# Altium PCB PCB.PcbDoc
Units mm, origin at the board's own origin, x right, y up, seen from the top; angles counter-clockwise.
Board outline 46.61 x 33.91 mm, 2 copper layers (Top Layer, Bottom Layer); 65 components, 51 nets, 209 pads, 88 vias.
Unrouted connection lines stored in the file: 2.
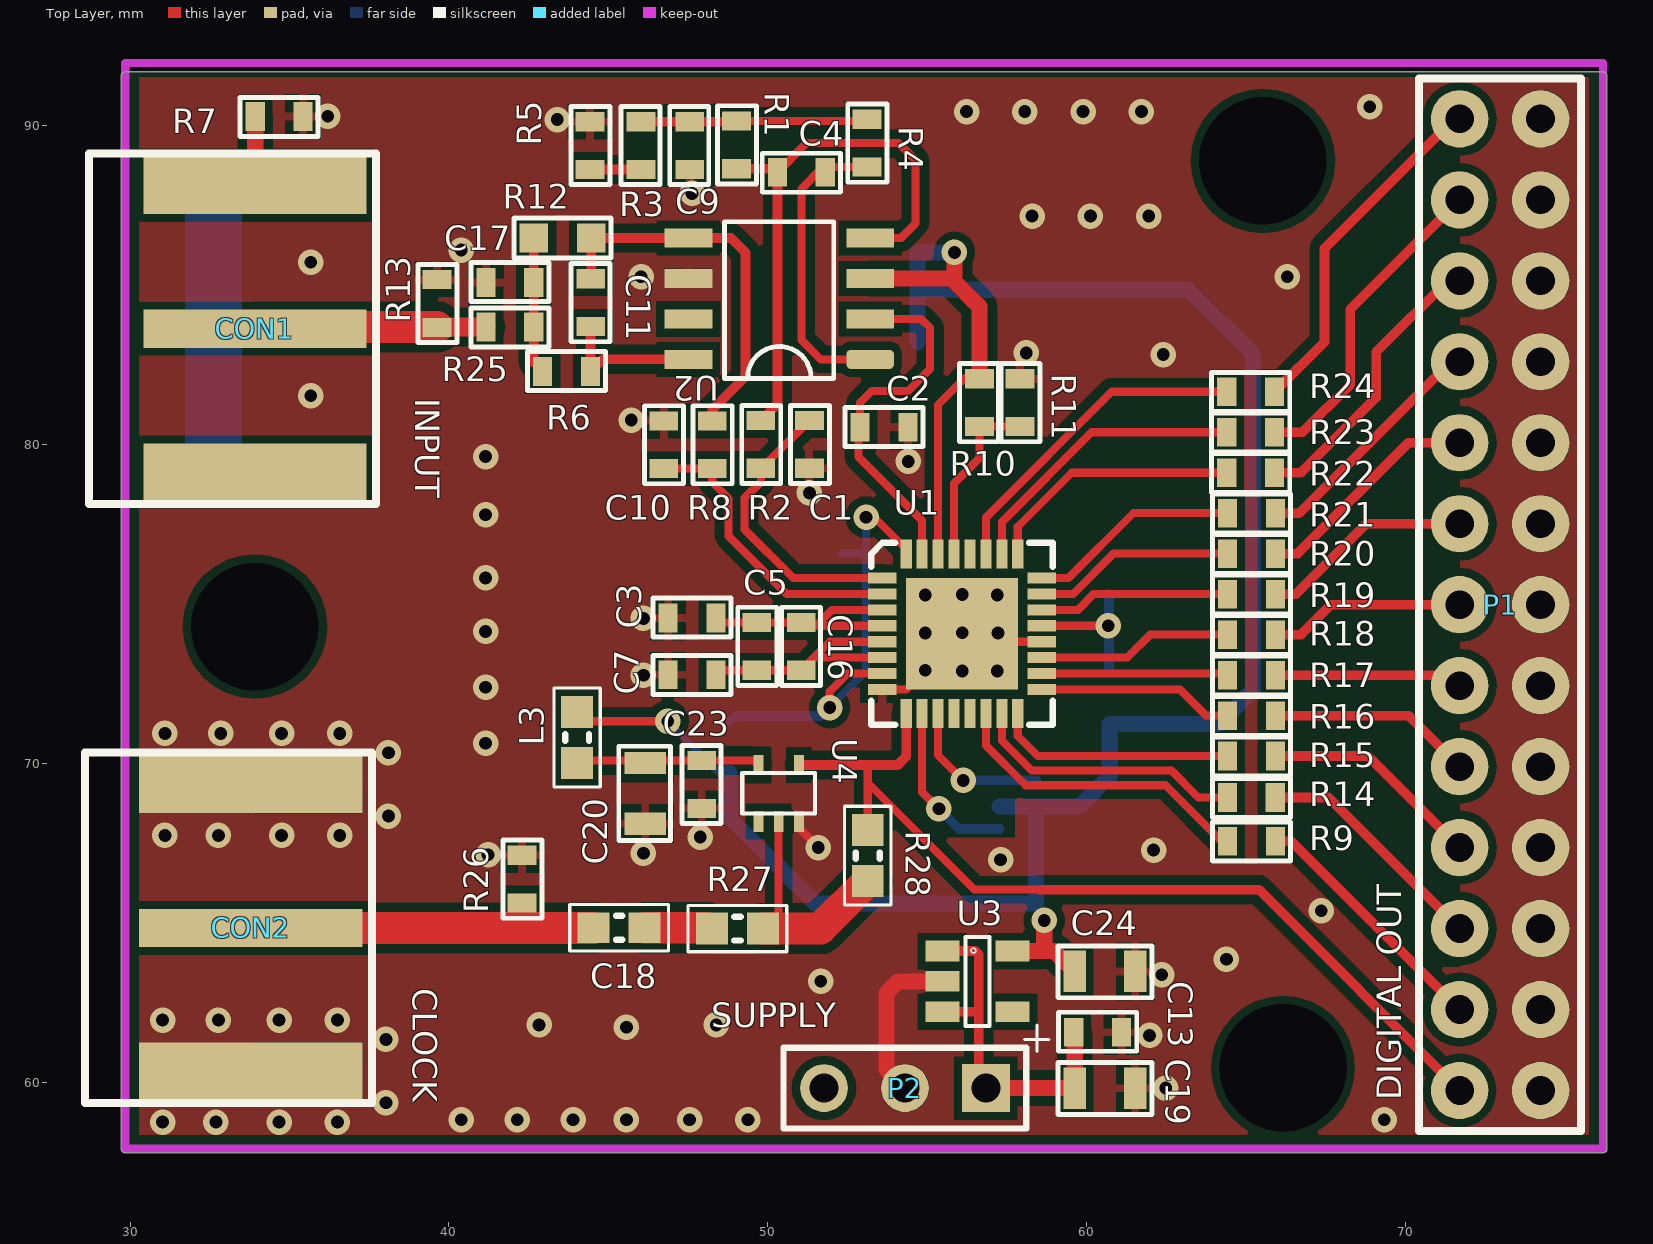
[diagram p0: Top Layer view]
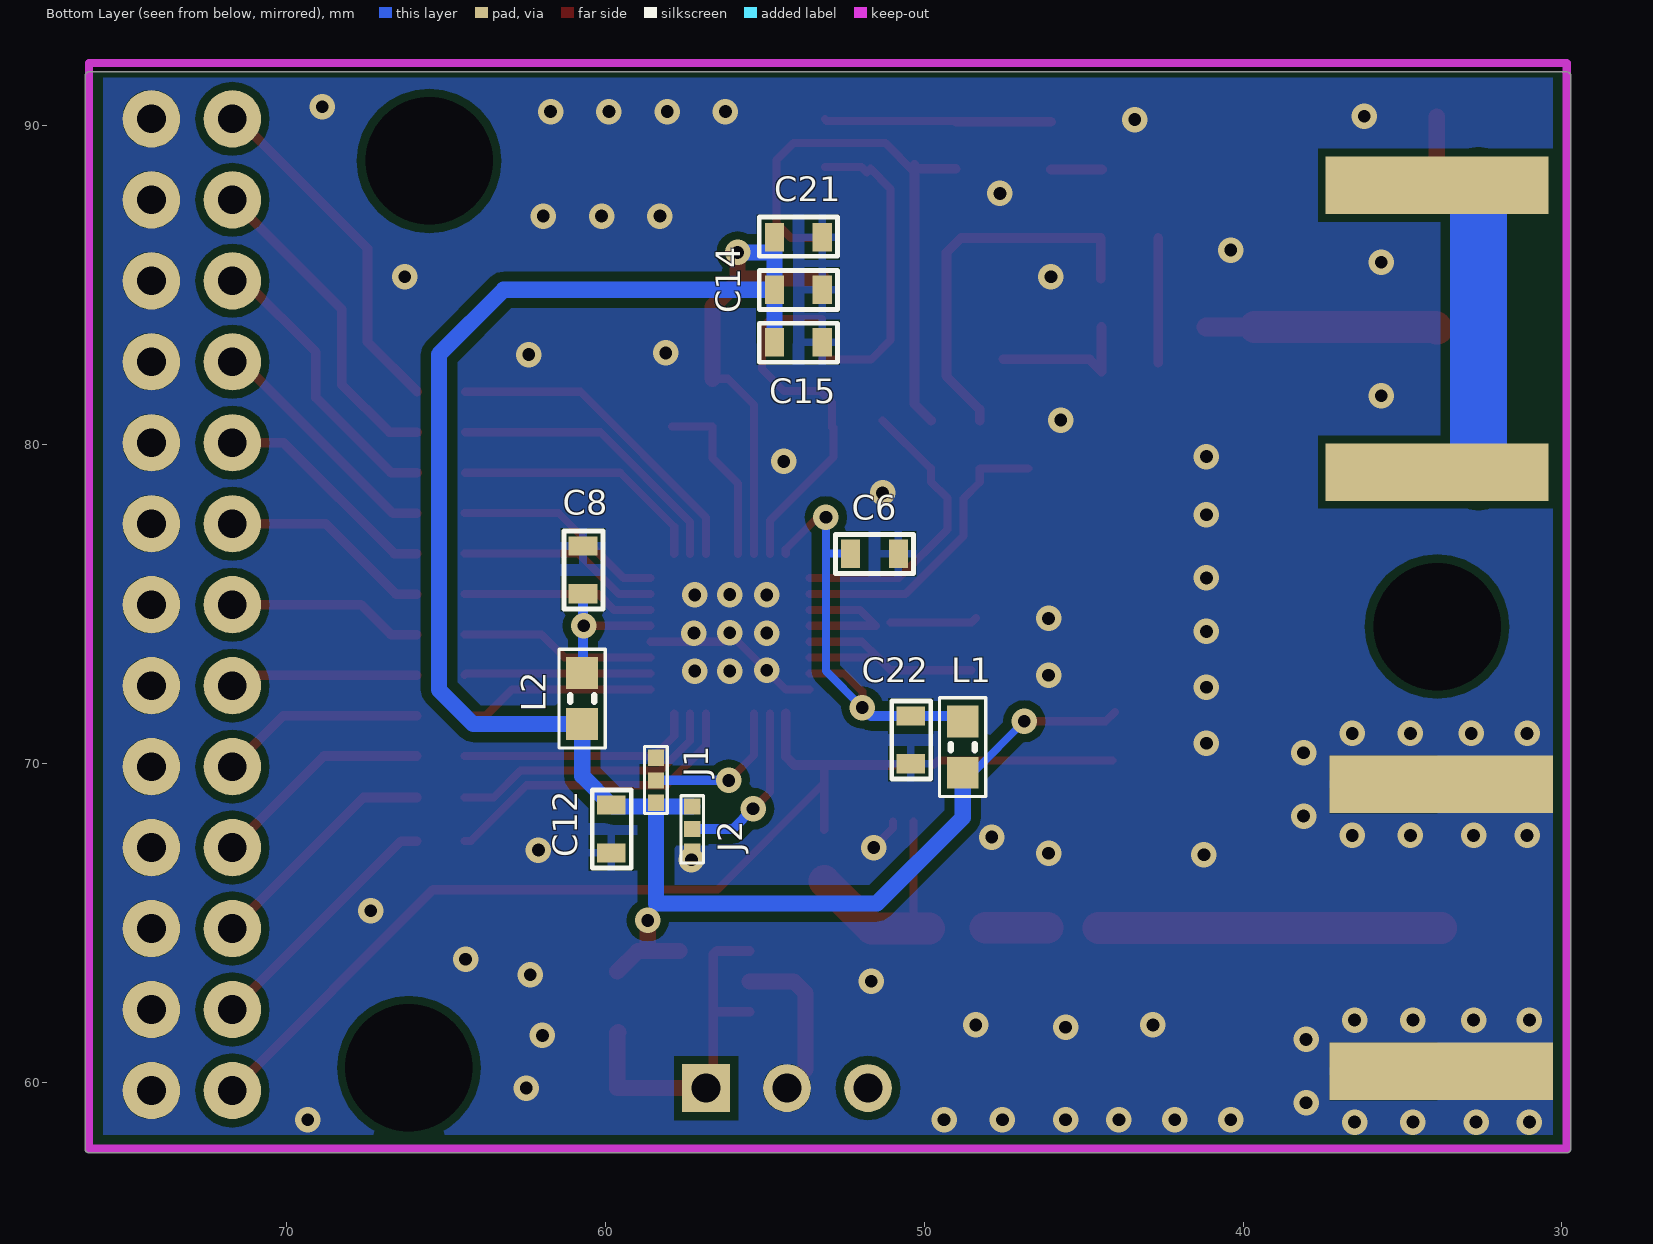
[diagram p1: Bottom Layer view, seen from below]
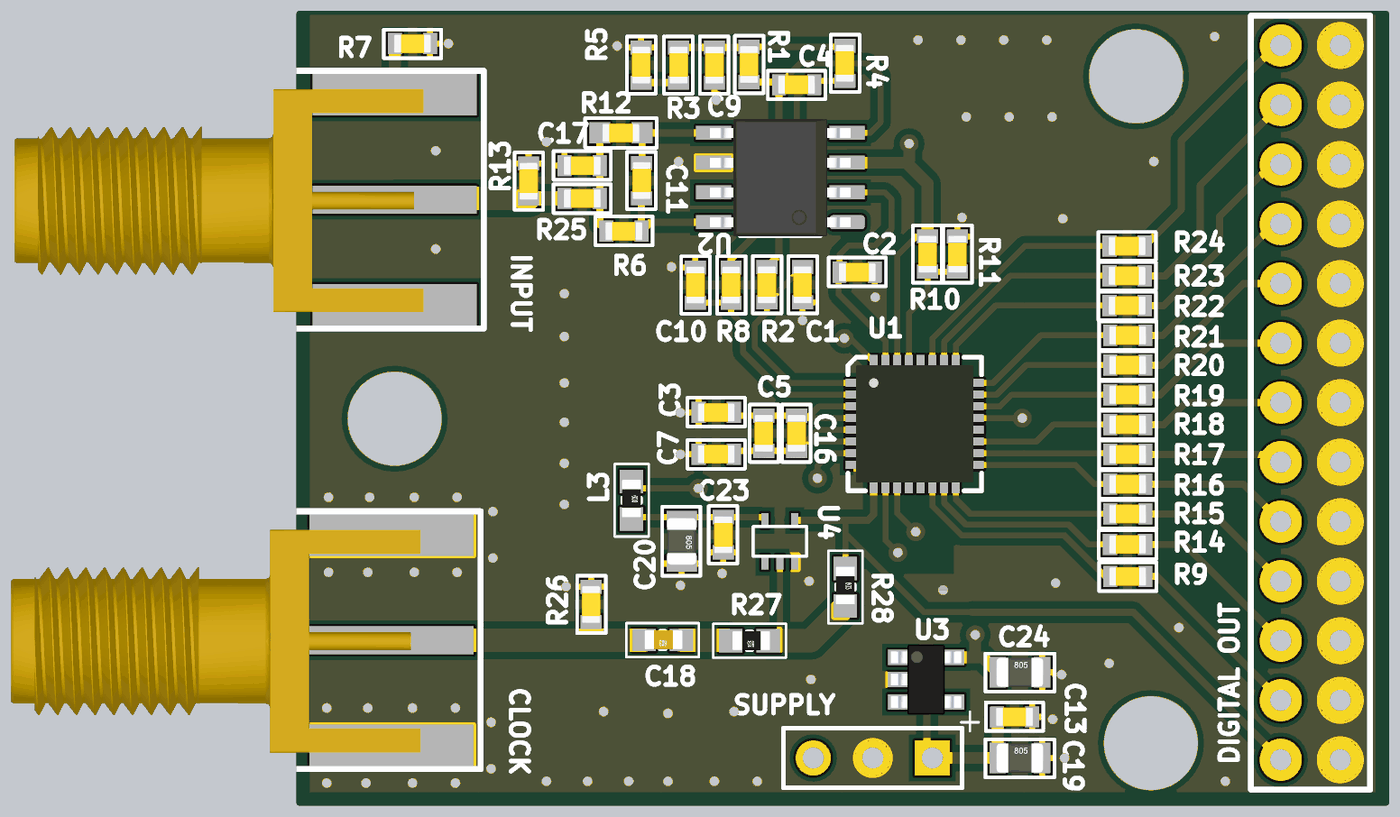
[diagram p2: 3D render of the assembled board from above, using the file's embedded part models]
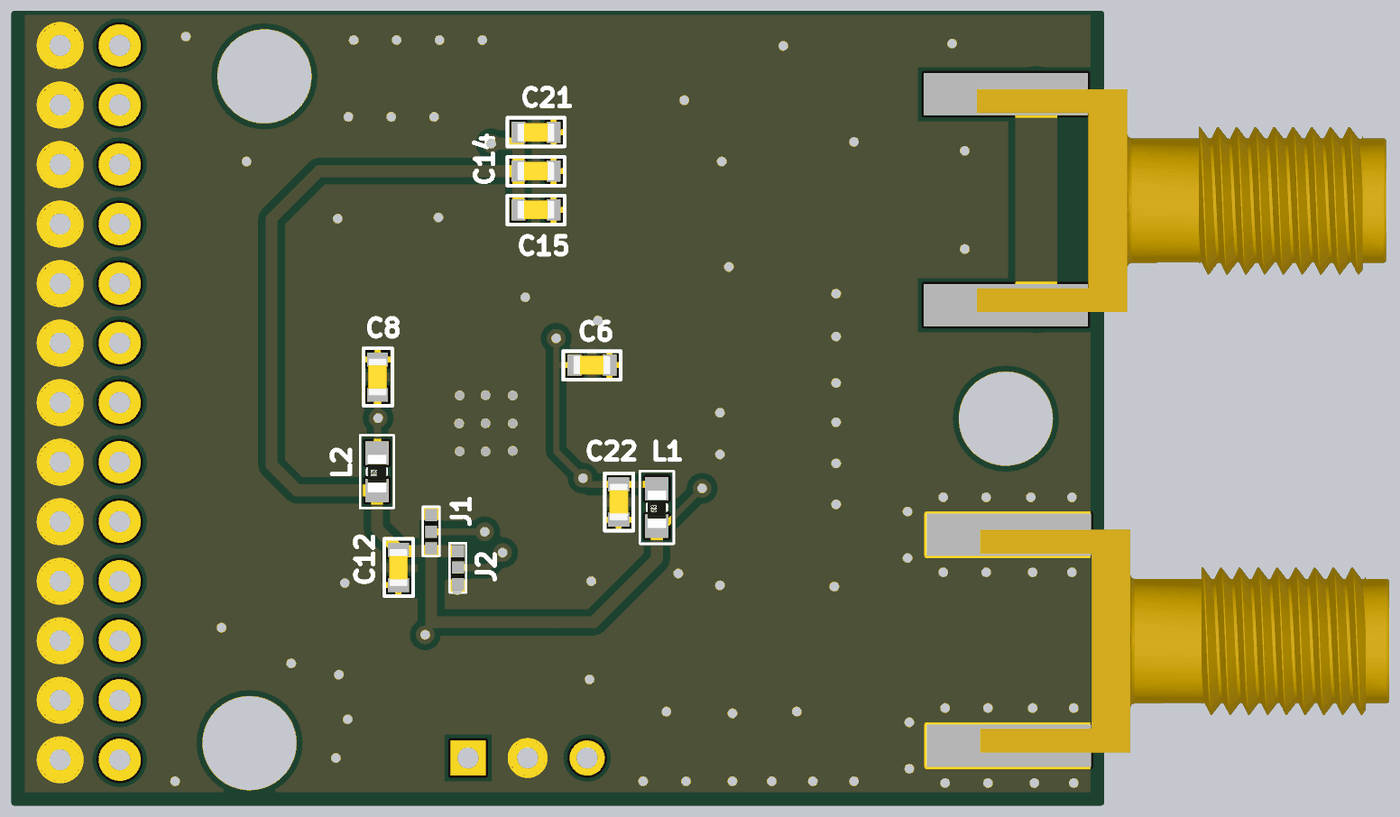
[diagram p3: 3D render of the assembled board from below, using the file's embedded part models]

## Layer stack, top to bottom
Top Solder: solder mask 0.0102, Solder Resist, Dk 3.5
Top Layer: signal copper 0.0356
Dielectric 1: dielectric 0.32, FR-4, Dk 4.8
Bottom Layer: signal copper 0.0356
Bottom Solder: solder mask 0.0102, Solder Resist, Dk 3.5

## Board outline
29.845,57.785 cw(c29.845,57.912) 29.718,57.912 29.718,91.567 cw(c29.845,91.567) 29.845,91.694 76.2,91.694 cw(c76.2,91.567) 76.327,91.567 76.327,57.912 cw(c76.2,57.912) 76.2,57.785

## Design rules (kind name [scope] priority, off if disabled: settings)
Clearance [All] p1: gap=0.305 except(0.127: SMDPad-SMDPad; 0.152: Track-SMDPad; 0.203: Track-Track THPad-THPad; 0.254: SMDPad-Poly THPad-Poly Via-Poly Fill-Poly Poly-Poly Poly-Region Poly-Text)
DiffPairsRouting [All] p1: maxlimit=0.254 minlimit=0.254 mostfreqgap=0.254 toplayer_minwidth=0.254 toplayer_maxwidth=0.254 toplayer_prefwidth=0.254 bottomlayer_minwidth=0.254 bottomlayer_maxwidth=0.254 bottomlayer_prefwidth=0.254 maxuncoupledlength=12.7
Length InNet('OUT_P') [InNet('OUT_N')] p1: maxlimit=11.223 minlimit=0
PlaneConnect [All] p1: planeconnectstyle=Direct reliefexpansion=0.508 reliefentries=4 reliefconductorwidth=0.254 reliefairgap=0.254
PolygonConnect [(HasFootprint('0603') OR HasFootprint('0603CW') OR HasFootprint('0805') OR HasFootprint('R0603') OR HasFootprint('QFN32'))] p1: connectstyle=Relief reliefconductorwidth=0.254 reliefentries=4 polygonreliefangle="90 Angle" airgapwidth=0.254
PolygonConnect PolygonConnect_vias [(InNet('GND') AND isVia )] p2: connectstyle=Direct reliefconductorwidth=0.254 reliefentries=4 polygonreliefangle="90 Angle" airgapwidth=0.254
RoomDefinition schemat [InComponentClass('schemat')] p1: confinementstyle=ConfineIn formatcopy=TRUE lockcomponents=FALSE outline 0,9.779 517.271,9.779 517.271,148.717 0,148.717
RoutingVias [All] p1: holewidth=0.4 width=0.8 viastyle="Through Hole" minholewidth=0.4 minwidth=0.8 maxholewidth=0.4 maxwidth=0.8
SolderMaskExpansion [All] p1: expansion=0.102
Width [All] p1: maxlimit=2 minlimit=0.254 preferedwidth=0.305
28 further rules are at their usual default settings.

## Classes and differential pairs
differential pair OUT: +OUT_P -OUT_N

## Components (designator, comment, footprint, x,y, rotation, side; value= is the part's Value field where it differs from the comment)
C1 "6.8p" 0603 51.308,80.01 r270 top
C2 "2.2uF" 0603 53.645,80.543 r0 top
C3 "1uF" 0603 47.625,74.562 r0 top
C4 "0.47pF" 0603 51.054,88.544 r180 top
C5 "2.2uF" 0603 49.657,73.673 r270 top
C6 "100nF" 0603 51.562,76.581 r0 bottom
C7 "1uF" 0603 47.625,72.784 r180 top
C8 "100nF" 0603 60.706,76.073 r270 bottom
C9 "4.7pF" 0603 47.549,89.383 r90 top
C10 "6.8p" 0603 46.736,79.998 r270 top
C11 "0.47pF" 0603 44.45,84.455 r90 top
C12 "1u" 0603 59.817,67.945 r270 bottom
C13 "100n" 0603 60.35,61.57 r0 top
C14 "100nF" 0603 53.95,84.861 r0 bottom
C15 "10n" 0603 53.95,83.21 r0 bottom
C16 "100nF" 0603 51.054,73.673 r90 top
C17 "4.7pF" 0603 41.91,85.09 r0 top
C18 "100nF" C0603 45.339,64.846 r180 top
C19 "6.8u" 0805 60.579,59.817 r0 top
C20 "10uF X7R" 0805 46.152,69.063 r270 top
C21 "4.7uF" 0603 53.95,86.512 r180 bottom
C22 "100nF" 0603 50.419,70.739 r270 bottom
C23 "100nF" 0603 47.93,69.342 r90 top
C24 "10uF X7R" 0805 60.579,63.475 r0 top
CON1 "INPUT" SMA-16 33.909,88.138 r270 top
CON2 "CLOCK" SMA-16 33.782,69.342 r270 top
J1 "ZW2/1" ZW2/1 58.42,69.469 r90 bottom
J2 "ZW2/1" ZW2/1 57.277,67.945 r270 bottom
L1 "Bead" R0603 48.768,70.485 r90 bottom
L2 "Bead" R0603 60.706,72.009 r90 bottom
L3 "Bead" R0603 43.993,70.841 r270 top
P1 "DIGITAL OUT" Header2x13 71.704,90.221 r0 top
P2 "SUPPLY" HDR1X3 56.845,59.817 r180 top
R1 "6.2k" 0603 49.022,89.408 r270 top
R2 "560" 0603 49.784,80.01 r270 top
R3 "3k" 0603 46.025,89.383 r90 top
R4 "8.2k" 0603 53.111,89.459 r270 top
R5 "24.9" 0603 44.425,89.383 r270 top
R6 "8.2k" 0603 43.688,82.296 r0 top
R7 "2R" 0603 34.671,90.297 r180 top
R8 "560" 0603 48.26,79.998 r270 top
R9 "47R" 0603 65.176,67.564 r180 top
R10 "TBD" 0603 56.642,81.317 r90 top
R11 "TBD" 0603 57.912,81.317 r270 top
R12 "6.2k" 0603CW 43.561,86.487 r180 top
R13 "49.9R" 0603 39.624,84.43 r270 top
R14 "47R" 0603 65.172,68.93 r180 top
R15 "47R" 0603 65.176,70.231 r180 top
R16 "47R" 0603 65.176,71.501 r180 top
R17 "47R" 0603 65.176,72.771 r180 top
R18 "47R" 0603 65.176,74.041 r180 top
R19 "47R" 0603 65.176,75.311 r180 top
R20 "47R" 0603 65.176,76.581 r180 top
R21 "47R" 0603 65.176,77.851 r180 top
R22 "47R" 0603 65.151,79.121 r180 top
R23 "47R" 0603 65.151,80.391 r180 top
R24 "47R" 0603 65.151,81.661 r180 top
R25 "3k" 0603 41.91,83.693 r180 top
R26 "49.9R" 0603 42.291,66.37 r270 top
R27 "XX" R0603 49.073,64.846 r180 top
R28 "XX" R0603 53.111,67.132 r270 top
U1 "LTC2227" QFN32 53.594,75.819 r0 top
U2 "AD8132" SOIC8 53.213,82.677 r180 top
U3 "TLV70033DDCT" SOT23-5 56.54,63.094 r270 top
U4 "74AHC1G04" "TSSOP5 (SOT353-1)" 50.343,69.063 r0 top

## Footprints (in the part's own frame and the unit in brackets; to place one, negate y for a bottom-side part, rotate by r counter-clockwise, add the part's x,y. Pads: shape width x height; smd on the part's side, far side on the other; paste and mask are expansions set on the pad)
0603 [mm]
  rect 0.6x0.9 smd: 1(-0.75,0) 2(0.75,0)
  silkscreen extent -1.22,-0.6 1.22,0.63, body extent -0.8,-0.4 0.8,0.4, height 0.86
0603CW [mm]
  rect 0.9x0.9 smd: 1(-0.9,0) 2(0.9,0)
  silkscreen extent -1.53,-0.63 1.53,0.63, body extent -0.8,-0.4 0.8,0.4, height 0.86
0805 [mm]
  rect 0.7x1.3 smd: 1(-0.95,0) 2(0.95,0)
  silkscreen extent -1.48,-0.82 1.48,0.8, body extent -1,-0.62 1,0.62, height 0.78
C0603 [mm]
  rect 1x0.95 smd: 1(-0.8,0) 2(0.8,0)
  silkscreen extent -1.55,-0.72 1.55,0.72, body extent -0.84,-0.42 0.76,0.38, height 0.3
HDR1X3 [mm] "Connector; Header; 3 Position"
  rect 1.5x1.5 hole 0.9: 1(0,0)
  round 1.5 hole 0.9: 2(2.54,0) 3(5.08,0)
  silkscreen extent -1.27,-1.27 6.35,1.27
Header2x13 [mm] "2,54mm"
  round 1.8 hole 0.9: 1(0,0) 2(2.54,0) 3(0,-2.54) 4(2.54,-2.54) 5(0,-5.08) 6(2.54,-5.08) 7(0,-7.62) 8(2.54,-7.62) 9(0,-10.16) 10(2.54,-10.16) 11(0,-12.7) 12(2.54,-12.7) 13(0,-15.24) 14(2.54,-15.24) 15(0,-17.78) 16(2.54,-17.78) 17(0,-20.32) 18(2.54,-20.32) 19(0,-22.86) 20(2.54,-22.86) 21(0,-25.4) 22(2.54,-25.4) 23(0,-27.94) 24(2.54,-27.94) 25(0,-30.48) 26(2.54,-30.48)
  silkscreen extent -1.27,-31.75 3.81,1.27
QFN32 [mm]
  rect 0.9x0.35 smd: 1(0,0) 2(0,-0.5) 3(0,-1) 4(0,-1.5) 5(0,-2) 6(0,-2.5) 7(0,-3) 8(0,-3.5) 17(5,-3.5) 18(5,-3) 19(5,-2.5) 20(5,-2) 21(5,-1.5) 22(5,-1) 23(5,-0.5) 24(5,0)
  rect 0.35x0.9 smd: 9(0.75,-4.25) 10(1.25,-4.25) 11(1.75,-4.25) 12(2.25,-4.25) 13(2.75,-4.25) 14(3.25,-4.25) 15(3.75,-4.25) 16(4.25,-4.25) 25(4.25,0.75) 26(3.75,0.75) 27(3.25,0.75) 28(2.75,0.75) 29(2.25,0.75) 30(1.75,0.75) 31(1.25,0.75) 32(0.75,0.75)
  rect 3.5x3.5 smd: 33(2.5,-1.75)
  silkscreen extent -0.35,-4.6 5.35,1.1, body extent -0.01,-4.26 5.01,0.76, height 0.75
R0603 [mm]
  rect 1x1 smd: 1(-0.775,0.025) 2(0.825,0.025)
  silkscreen extent -1.52,-0.7 1.58,0.75, body extent -0.85,-0.38 0.75,0.42, height 0.3
SMA-16 [mm] "Gniazdo; SMA; ¿eñskie; z nakrêtk¹ monta¿ow¹, krawêdziowe; SMT"
  rect 1.8x7 smd far side: 1(0,0) 1(9,0)
  rect 1.8x7 smd: 1(0,0) 1(9,0)
  rect 1.2x7 smd: 2(4.5,0)
  silkscreen extent -1,-5.2 10,3.8, body extent -0.22,-16.22 9.3,1.23, height 3.16
SOIC8 [mm]
  rrect50% 1.5x0.6 smd: 1(0,0)
  rect 1.5x0.6 smd: 2(0,-1.27) 3(0,-2.54) 4(0,-3.81) 5(5.7,-3.81) 6(5.7,-2.54) 7(5.7,-1.27) 8(5.7,0)
  silkscreen extent 1.14,-4.32 4.57,0.6, body extent -0.16,-4.41 5.86,0.6, height 1.75
SOT23-5 [mm]
  rect 0.65x1.06 smd: 1(-1.02,-1.06) 2(-0.07,-1.06) 3(0.88,-1.06) 4(0.88,1.14) 5(-1.02,1.14)
  silkscreen extent -1.47,-0.34 1.33,0.42, body extent -1.57,-1.46 1.43,1.54, height 1.3
"TSSOP5 (SOT353-1)" [mil]
  rect 12x25 smd: 1(-25,-35) 2(0,-35) 3(25,-35) 4(25,35) 5(-25,35)
  silkscreen extent -45,-25 45,25
ZW2/1 [mil] "Kropla cyny"
  rect 20x20 smd: 1(-27.56,0) 2(0,0) 3(28,0)
  silkscreen extent -41,-14 42,14

## Part data
C1 C2 C3 C4 C5 C6 C7 C8 C9 C10 C11 C12 C13 C14 C15 C16 C17 C18 C19 C20 C21 C22 C23 C24: library part "Kondensator ceramiczny"
CON1 CON2: library part SMA
L1 L2 L3: library part Inductor, "Inductor"
P1: library part Header2x13
P2: library part "Header 3", "Header, 3-Pin"
R1 R2 R3 R4 R5 R6 R7 R8 R9 R10 R11 R12 R13 R14 R15 R16 R17 R18 R19 R20 R21 R22 R23 R24 R25 R26 R27 R28: library part Rezystor
U1: library part LTC222x
U3: library part LP2980AIM5-3.3, "Micropower 50 mA Ultra Low-Dropout Regulator, 5-pin SOT-23"
U4: "74AHC1G04 and 74AHCT1G04 are high-speed Si-gate CMOS devices. They provide an  inverting buffer."

## Free pads (board coordinates)
  round 1.8 hole 4: 2(66.167,60.452) 3(33.909,74.295) 3(65.532,88.9)

## Via types
v1: diameter 0.8, hole 0.4, Top Layer to Bottom Layer, tented both sides, 79 vias
v2: diameter 0.8, hole 0.4, Top Layer to Bottom Layer, tented bottom, 9 vias

## Nets (pads, with @x,y where several pads share a name; then routed paths per layer and width w, separated by ;. In a path a pad name is that pad's centre, name@x,y a point inside that pad or via, vN(x,y) a via of type N, cw(c..) or ccw(c..) an arc to the next point about the centre after c; other vN are vias at no path point)
3V3: C12.1 C14.2 C15.2 C21.1 C24.1 J1.1 J2.1 L1.1 L2.1 L3.1 R10.2 U1.30 U2.3 U3.5 | length 73.4
  Top Layer w0.254: L3.1 44.31,71.323 v1(46.863,71.323) ; U1.30 55.344,81.252 56.159,82.067 R10.2
  Top Layer w0.508: U2.3 55.753,85.217 ; v1(55.855,86.03) 55.855,85.319 55.753,85.217 ; R10.2 56.642,84.328 55.753,85.217 ; U3.5 58.674,64.114 ; v1(58.674,65.075) 58.674,64.114 ; C24.1 58.99,64.114 58.674,64.114
  Bottom Layer w0.254: v1(46.863,71.323) 48.476,69.71 L1.1
  Bottom Layer w0.508: L1.1 48.793,68.301 51.486,65.608 58.42,65.608 J1.1@58.42,68.645 ; C15.2 C14.2 ; v1(55.855,86.03) 54.7,86.03 C14.2 ; J2.1 J1.1@58.42,68.645 ; C14.2 63.195,84.861 65.227,82.829 65.227,72.314 64.148,71.234 L2.1 60.731,69.609 C12.1 59.767,68.645 J1.1@58.42,68.645
GND: C1.2 C2.2 C3.1 C6.1 C7.2 C8.1 C9.1 C10.1 C12.2 C13.2 C14.1 C15.1 C17.1 C19.2 C20.2 C21.2 C22.2 C23.1 C24.2 CON2.1 J1.3 J2.3 P1.2 P1.4 P1.6 P1.8 P1.10 P1.12 P1.14 P1.16 P1.18 P1.20 P1.22 P1.24 P1.26 P2.2 R5.1 R7.1 R11.1 R13.1 R26.1 U1.8 U1.20 U1.33 U2.6 U3.2 U4.3 | length 11.7
  Top Layer w0.254: U4.3 50.978,67.97 v1(51.587,67.361) ; U1.8 54.344,72.319 U1.33 ; U1.33@56.344,73.819 U1.20
  Top Layer w0.508: P2.2 53.721,60.401 53.721,62.789 54.096,63.164 U3.2
  other v1: 31.013,58.75 32.69,58.75 34.671,58.75 36.5,58.75 40.386,58.826 42.139,58.826 43.891,58.826 45.568,58.826 47.549,58.826 49.378,58.826 69.342,58.826 38.024,59.36 62.484,59.817 38.024,61.341 61.976,61.468 45.568,61.722 42.824,61.798 48.387,61.798 31.013,61.951 32.766,61.951 34.671,61.951 36.5,61.951 51.664,63.17 62.357,63.373 64.389,63.856 67.361,65.38 57.302,66.98 41.224,67.132 46.101,67.183 62.103,67.285 47.879,67.691 31.09,67.742 32.766,67.742 34.747,67.742 36.576,67.742 38.1,68.351 38.1,70.333 41.148,70.637 31.09,70.942 32.842,70.942 34.747,70.942 36.576,70.942 41.148,72.39 46.101,72.771 41.148,74.143 46.101,74.549 41.148,75.819 41.148,77.8 51.308,78.486 54.407,79.477 41.148,79.629 45.72,80.772 35.662,81.534 62.408,82.829 58.108,82.879 46.025,85.268 66.294,85.268 35.662,85.725 40.386,86.106 58.293,87.173 60.122,87.173 61.951,87.173 47.625,87.884 43.4,90.2 36.2,90.3 56.236,90.449 58.064,90.449 59.893,90.449 61.722,90.449 68.885,90.602
  other v2: 56.1,72.9 57.201,72.898 54.94,72.923 54.94,74.092 56.1,74.1 57.226,74.092 54.94,75.286 57.201,75.286 56.1,75.3
NetC2_1: C2.1 U1.31 U2.2 | length 11.5
  Top Layer w0.254: C2.1@52.844,80.543 52.844,79.617 54.844,77.617 U1.31 ; C2.1 52.895,81.317 53.264,81.686 54.407,81.686 55.093,82.372 55.093,83.668 54.813,83.947 U2.2
NetC3_2: C3.2 C5.1 C16.2 U1.3 U1.4 | length 7.1
  Top Layer w0.254: C3.2 48.514,74.423 C5.1 C16.2 ; U1.4 51.511,74.319 52.011,74.819 U1.3
NetC4_1: C4.1 R4.2 U2.1 | length 9.4
  Top Layer w0.254: C4.1@51.69,88.659 51.054,88.023 51.054,83.287 51.664,82.677 U2.1 ; C4.1 51.968,88.709 R4.2
NetC4_2: C4.2 R1.2 R2.1 U2.4 | length 17.9
  Top Layer w0.254: C4.2 51.218,89.459 54.102,89.459 54.635,88.925 54.635,86.944 54.178,86.487 U2.4
  Top Layer w0.305: R1.2 C4.2@50.189,88.658 ; R2.1 50.304,81.28 C4.2 C4.2@50.304,88.773
NetC5_2: C5.2 C7.1 C16.1 U1.5 U1.6 | length 7.6
  Top Layer w0.254: C7.1@48.514,72.923 C5.2 C16.1 51.45,73.319 ; U1.6 51.45,73.319 ; U1.5 51.95,73.819 51.45,73.319
NetC6_2: C6.2 C22.1 L1.2 U1.7 U1.32 | length 14.8
  Top Layer w0.254: v1(51.943,71.755) 51.943,72.263 52.499,72.819 U1.7 ; v1(53.086,77.724) 53.34,77.724 54.344,76.72 U1.32
  Bottom Layer w0.254: v1(51.943,71.755) 53.086,72.898 53.086,76.581 ; C6.2 53.086,76.581 ; v1(53.086,77.724) 53.086,76.581
  Bottom Layer w0.305: L1.2 48.972,71.489 C22.1 51.677,71.489 v1(51.943,71.755)
NetC8_2: C8.2 L2.2 U1.21 | length 4.6
  Top Layer w0.254: U1.21 v1(60.682,74.319)
  Bottom Layer w0.305: L2.2@60.706,72.86 C8.2
NetC9_2: C9.2 R1.1 R3.2 R4.1 | length 7.1
  Top Layer w0.254: R1.1 53.061,90.158 R4.1
  Top Layer w0.305: R3.2 C9.2 R1.1@48.997,90.133
NetC11_1: C11.1 R6.2 U2.8 | length 4.6
  Top Layer w0.305: C11.1@44.438,83.693 R6.2 44.819,82.677 U2.8
NetC11_2: C11.2 R8.1 R12.1 U2.5 | length 12
  Top Layer w0.305: C11.2@44.461,85.216 R12.1 U2.5 48.844,86.487 49.301,86.03 49.301,82.144 48.26,81.102 R8.1
NetC13_1: C13.1 C19.1 P2.1 U3.1 U3.3 | length 10.7
  Top Layer w0.305: U3.3 56.506,62.214 ; U3.1 56.511,64.114 56.617,64.008 P2.1@56.617,60.046
  Top Layer w0.508: P2.1 C19.1 59.629,61.541 C13.1
NetC17_2: C17.2 R6.1 R12.2 R25.1 | length 3.9
  Top Layer w0.305: R6.1@42.661,82.573 R12.2
NetC18_1: C18.1 R27.2 | length 1.9
  Top Layer w1: C18.1 R27.2@48.082,64.846
NetC18_2: C18.2 CON2.2 R26.2 | length 10.8
  Top Layer w1: CON2.2 44.535,64.842 C18.2
NetC20_1: C20.1 C23.2 L3.2 U4.5 | length 5.7
  Top Layer w0.254: L3.2@44.095,70.092 C23.2 49.567,70.092 U4.5
NetCON1_1: CON1.1 R7.2 | length 11.5
  Top Layer w0.508: CON1.1@33.921,88.15 R7.2
  Bottom Layer w0.508: CON1.1@32.233,79.138 CON1.1@32.614,79.138
  Bottom Layer w1.778: CON1.1@32.614,79.138 CON1.1@32.614,88.138
NetCON1_2: CON1.2 R13.2 R25.2 | length 7.3
  Top Layer w0.6: R13.2 39.637,83.693 R25.2
  Top Layer w1: CON1.2 33.964,83.693 R13.2@39.624,83.693
NetJ1_2: J1.2 U1.11 | length 4.7
  Top Layer w0.254: U1.11 55.344,70.259 v1(56.134,69.469)
  Bottom Layer w0.305: v1(56.134,69.469) J1.2
NetJ2_2: J2.2 U1.10 | length 5.4
  Top Layer w0.254: U1.10 54.844,69.108 v1(55.372,68.58)
  Bottom Layer w0.305: v1(55.372,68.58) 56.007,67.945 J2.2
NetP1_1: P1.1 R24.1 | length 11.3
  Top Layer w0.305: R24.1 67.462,83.222 67.462,86.157 71.526,90.221 P1.1 P1.1@71.704,89.992
NetP1_3: P1.3 R23.1 | length 10.2
  Top Layer w0.305: R23.1 66.777,80.391 68.275,81.89 68.275,84.252 P1.3
NetP1_5: P1.5 R22.1 | length 9.1
  Top Layer w0.305: R22.1 66.726,79.121 69.088,81.483 69.088,82.906 71.323,85.141 P1.5
NetP1_7: P1.7 R21.1 | length 7.7
  Top Layer w0.305: R21.1 66.675,77.851 71.425,82.601 P1.7
NetP1_9: P1.9 R20.1 | length 7.2
  Top Layer w0.305: R20.1 66.624,76.581 70.104,80.061 P1.9
NetP1_11: P1.11 R19.1 | length 6.7
  Top Layer w0.305: R19.1 66.573,75.311 68.783,77.521 P1.11
NetP1_13: P1.13 R18.1 | length 6.2
  Top Layer w0.305: R18.1 66.726,74.041 67.666,74.981 P1.13
NetP1_15: P1.15 R17.1 | length 5.9
  Top Layer w0.305: R17.1 71.374,72.771 P1.15
NetP1_17: P1.17 R16.1 | length 6.4
  Top Layer w0.305: R16.1 70.104,71.501 P1.17
NetP1_19: P1.19 R15.1 | length 7
  Top Layer w0.305: R15.1 68.834,70.231 P1.19
NetP1_21: P1.21 R14.1 | length 7.5
  Top Layer w0.305: R14.1 67.595,68.93 P1.21
NetP1_23: P1.23 R9.1 | length 8
  Top Layer w0.305: R9.1 66.421,67.564 P1.23
NetP1_25: P1.25 R28.1 U1.9 U4.4 | length 29.4
  Top Layer w0.254: 53.111,69.952 53.137,69.926 53.137,69.393 ; R28.1 53.137,69.393 ; 58.522,66.04 56.49,66.04 53.137,69.393
  Top Layer w0.305: U4.4 53.111,69.952 54.078,69.952 54.344,70.218 U1.9 ; 58.522,66.04 65.405,66.04 P1.25
NetR3_1: R3.1 R5.2 | length 1.6
  Top Layer w0.305: R5.2 R3.1
NetR9_2: R9.2 U1.14 | length 9.8
  Top Layer w0.254: U1.14 56.844,70.565 58.092,69.317 62.472,69.317 64.225,67.564 R9.2
NetR10_1: R10.1 R11.2 U1.29 | length 5.6
  Top Layer w0.254: U1.29 55.844,78.78 56.642,79.578 R10.1 R11.2
NetR14_2: R14.2 U1.15 | length 8.7
  Top Layer w0.254: U1.15 57.344,70.711 58.281,69.774 62.662,69.774 63.505,68.93 R14.2
NetR15_2: R15.2 U1.16 | length 7.6
  Top Layer w0.254: U1.16 57.844,70.858 58.471,70.231 R15.2
NetR16_2: R16.2 U1.17 | length 6.2
  Top Layer w0.254: U1.17 62.936,72.319 63.754,71.501 R16.2
NetR17_2: R17.2 U1.18 | length 5.9
  Top Layer w0.254: U1.18 64.378,72.819 R17.2
NetR18_2: R18.2 U1.19 | length 6.1
  Top Layer w0.254: U1.19 61.279,73.319 62.001,74.041 R18.2
NetR19_2: R19.2 U1.22 | length 6
  Top Layer w0.254: U1.22 59.729,74.819 60.221,75.311 R19.2
NetR20_2: R20.2 U1.23 | length 6.4
  Top Layer w0.254: U1.23 59.583,75.319 60.845,76.581 R20.2
NetR21_2: R21.2 U1.24 | length 6.7
  Top Layer w0.254: U1.24 59.436,75.819 61.468,77.851 R21.2
NetR22_2: R22.2 U1.25 | length 8.1
  Top Layer w0.254: U1.25 57.844,77.427 59.538,79.121 R22.2
NetR23_2: R23.2 U1.26 | length 9.2
  Top Layer w0.254: U1.26 57.344,77.574 60.161,80.391 R23.2
NetR24_2: R24.2 U1.27 | length 10.3
  Top Layer w0.254: U1.27 56.844,77.721 60.784,81.661 R24.2
NetR27_1: R27.1 R28.2 U4.2 | length 7.5
  Top Layer w0.254: R27.1 50.343,65.316 U4.2
  Top Layer w1: R27.1 51.651,64.821 R28.2
OUT_N: C10.2 R8.2 U1.2 | length 9.4
  Top Layer w0.254: C10.2 R8.2 48.26,78.821 48.768,78.313 48.768,77.133 50.59,75.311 U1.2@53.594,75.311
OUT_P: C1.1 R2.2 U1.1 | length 9.2
  Top Layer w0.254: C1.1 49.808,79.26 R2.2 49.784,78.833 49.276,78.325 49.276,77.343 50.8,75.819 U1.1
pads on no net: P2.3 U1.12 U1.13 U1.28 U2.7 U3.4 U4.1

## Polygon pours and split planes (outlines as drawn)
GND on Top Layer "Top Layer-No Net" (solid, remove dead copper, pour order 2): 29.87,91.567 76.2,91.567 76.2,57.988 76.2,57.912 29.87,57.912
GND on Bottom Layer "Top Layer-No Net" (solid, remove dead copper, pour order 4): 29.845,91.516 76.2,91.516 76.2,57.836 76.2,57.912 29.794,57.912

## Keep-outs
Keep-Out Layer:
  lines w0.254: 29.845,57.912 76.2,57.912 76.2,91.973 29.845,91.973 29.845,57.912

## Other copper
Top Layer:
  pour cut-out: 71.704,90.221 71.704,63.627 69.952,63.627 65.926,67.564 65.901,81.661 67.462,83.668 67.437,86.411
  pour cut-out: 55.016,71.018 55.016,67.666 57.76,67.666 57.76,71.018
  pour cut-out: 45.321,89.579 45.321,89.078 51.054,89.078 51.054,89.84
  pour cut-out: 55.855,81.763 55.855,80.848 58.522,80.848 58.522,81.763

## Silkscreen, mask and mechanical layers (free items; w line width, h text height)
Top Overlay:
  lines w0.1: 58.064,61.341 58.826,61.341 ; 58.445,60.96 58.445,61.798